# EAGLE board 120_button (EAGLE 8.2.2)
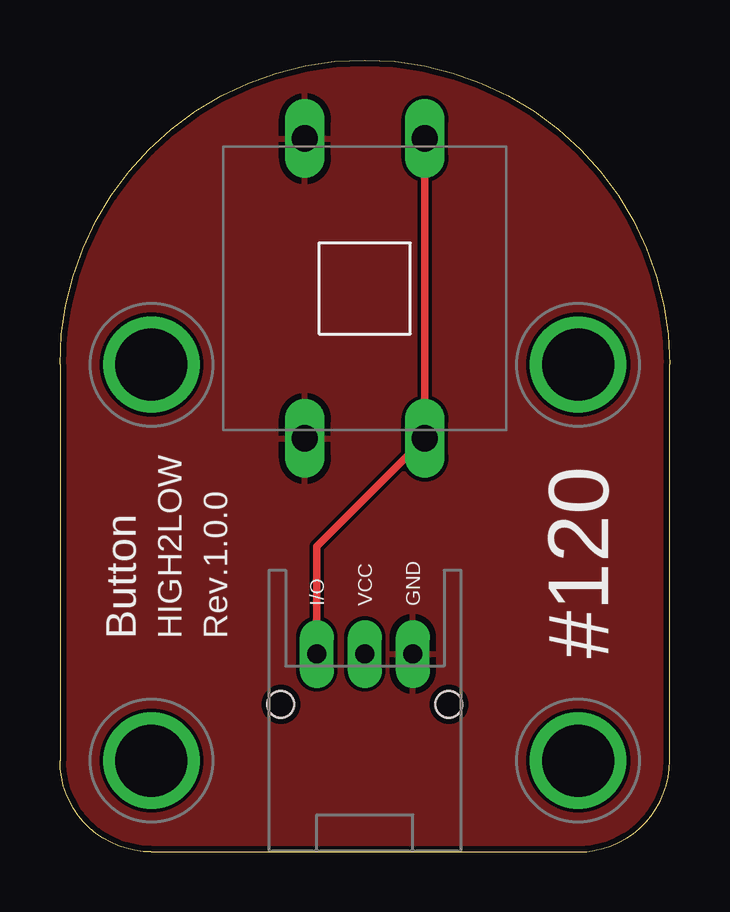
[diagram p0: board, top side]
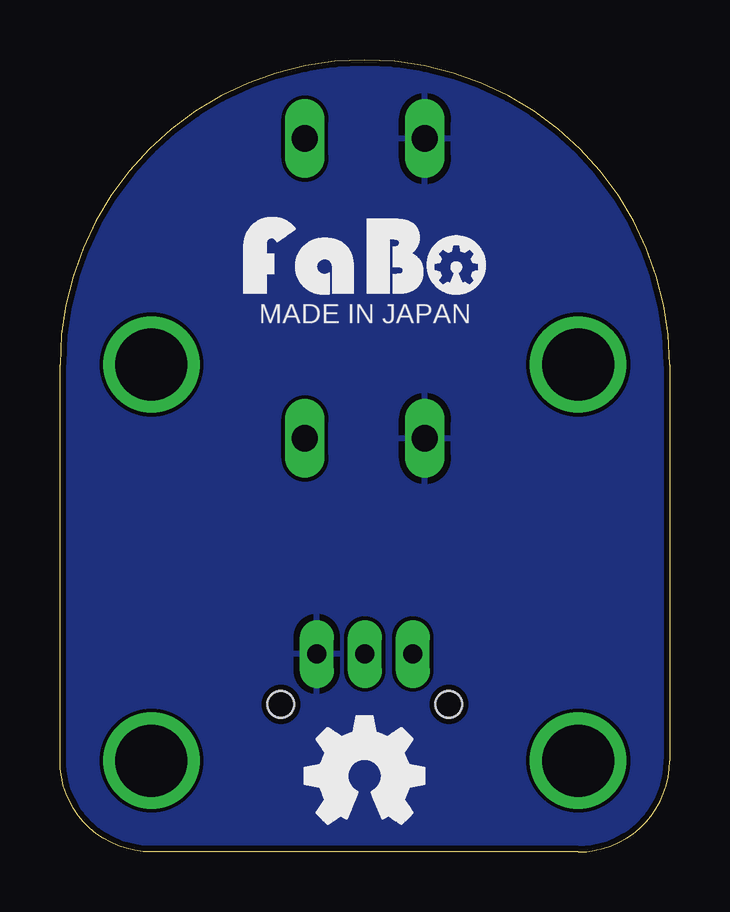
[diagram p1: board, bottom side, seen from below]

Size 25.4 x 33.02 mm. Coordinates in mm from the lower left corner, seen from the top.
Copper layers (1*16): Top 0.035mm / dielectric 1.5mm / Bottom 0.035mm
Design rules "SeeedStudio_2layer_DRU_no_angle_20140221": minimum track width 6mil, minimum drill 12mil, track to track 6mil, track to pad 6mil, pad to pad 6mil, via to via 6mil, smd to smd 0mil, copper to edge 10mil, drill to drill 10mil, minimum pad ring 10mil, minimum via ring 6mil, stop-mask expansion 2mil, vias tented up to drill 100mil, thermal gap 10mil

## Footprints (pad centres in the part's own frame; a part is rotated, then mirrored left to right if it is on the bottom)
FABO_BRICK_3PIN = drill 0.8 pad 1.422 long: GND 2,-8.255; I/O -2,-8.255; VCC 0,-8.255 | drill 3 pad 3.81: P$1 -8.89,3.81; P$2 8.89,3.81; P$3 -8.89,-12.7; P$4 8.89,-12.7 | hole 1.1: -3.5,-10.355; 3.5,-10.355
1273HA-160G-G = drill 1.1 long: 1 -6.25,2.5; 2 6.25,2.5; 3 -6.25,-2.5; 4 6.25,-2.5

## Placement (x,y rotation side)
J1  [FABO_BRICK_3PIN]  12.7,16.51 0 top
S1  [1273HA-160G-G]  12.7,23.5 90 top
U$2  [LOGO_OSHW_M_BOTTOM]  12.7,3.17 0 top
U$3  [LOGO_FABO_MS_BOTTOM]  12.7,22.86 0 top

## Library data of the parts
J1 = FaBo-Template
S1 = FaBo-Switch
U$2 U$3 = FaBo-etc

## Nets
GND: J1.GND S1.1 S1.2
N$4: J1.I/O S1.3 S1.4

## Tracks (layer width: path | path; a pad name or v marks a point on that pad's centre or on a via)
GND
  pour Bottom: 0,0 25.4,0 25.4,33.02 0,33.02
  pour Top: 0,0 25.4,0 25.4,33.02 0,33.02
N$4
  Top 0.305: J1.I/O 10.7,12.74 S1.3 S1.4

## Text on the board
tPlace: #120 | Button | HIGH2LOW | Rev.1.0.0
bPlace: MADE IN JAPAN